# Altium PCB Joystick OMNI ADC.PcbDoc
Units mil, origin at the board's own origin, x right, y up, seen from the top; angles counter-clockwise.
Board outline 6000 x 4000 mil, 2 copper layers (Top Layer, Bottom Layer); 9 components, 0 nets, 69 pads, 0 vias.
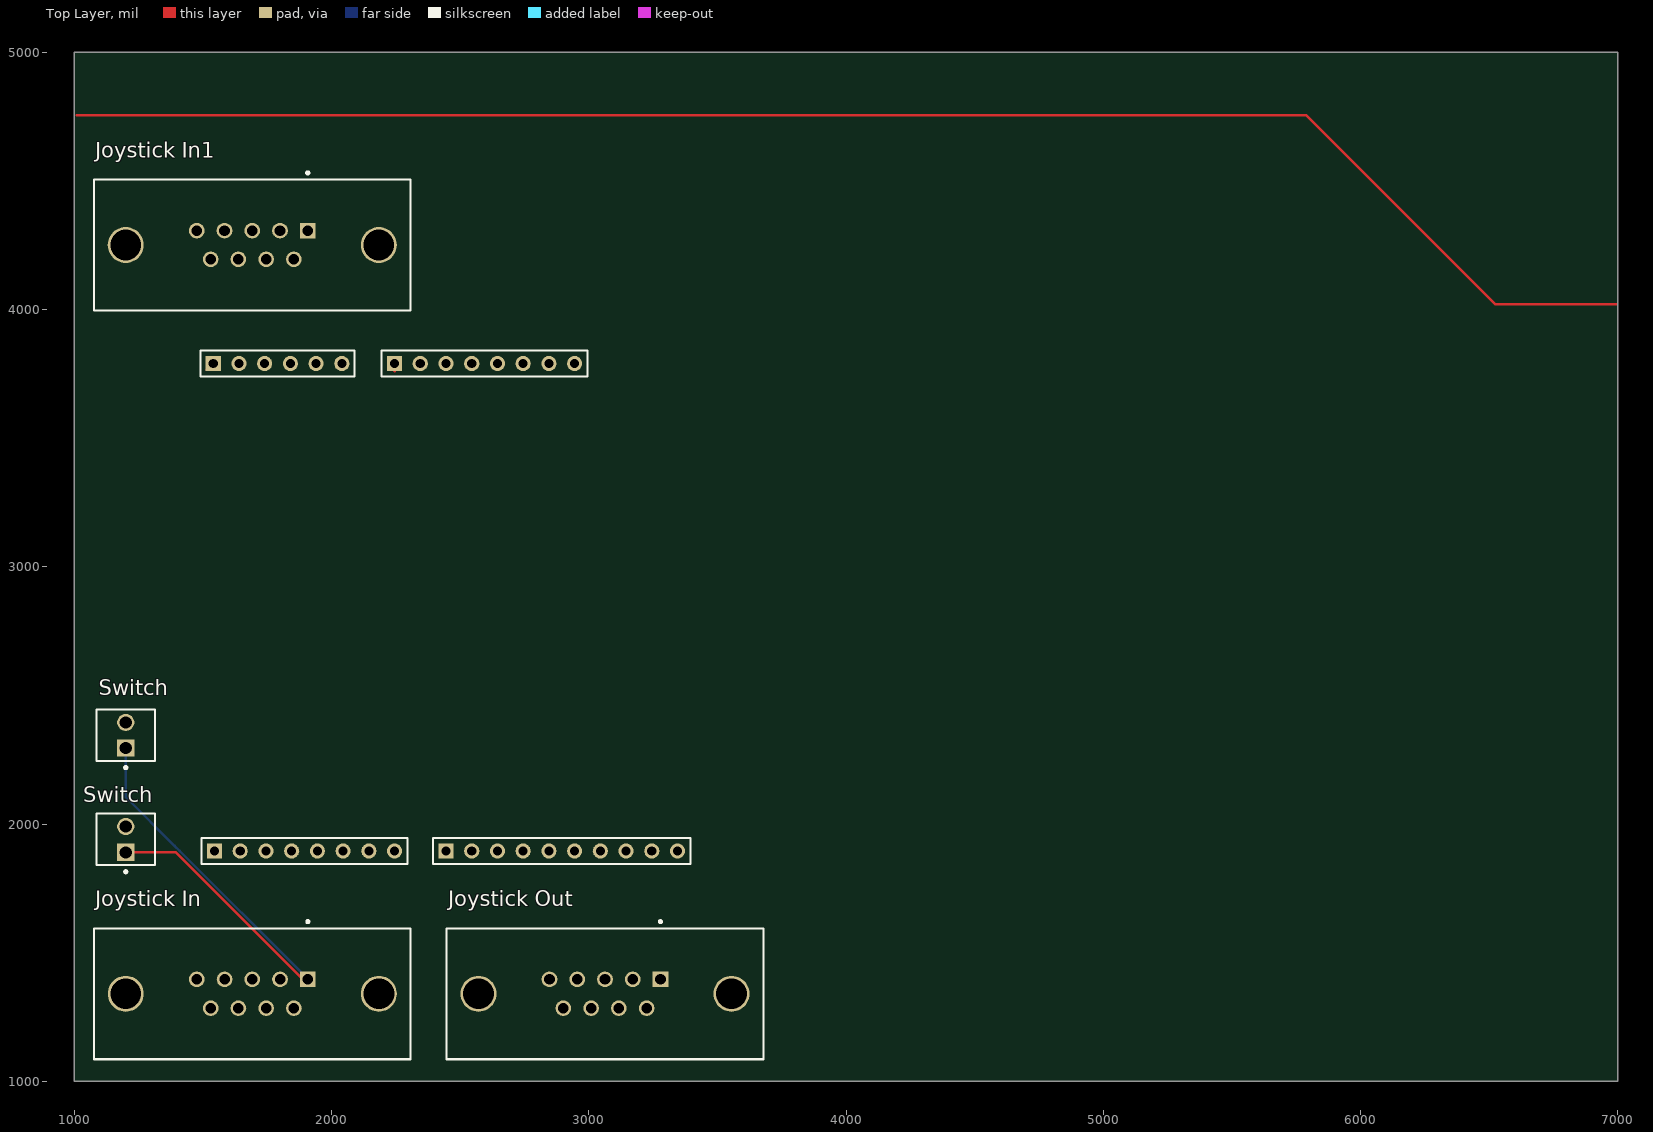
[diagram p0: Top Layer view]
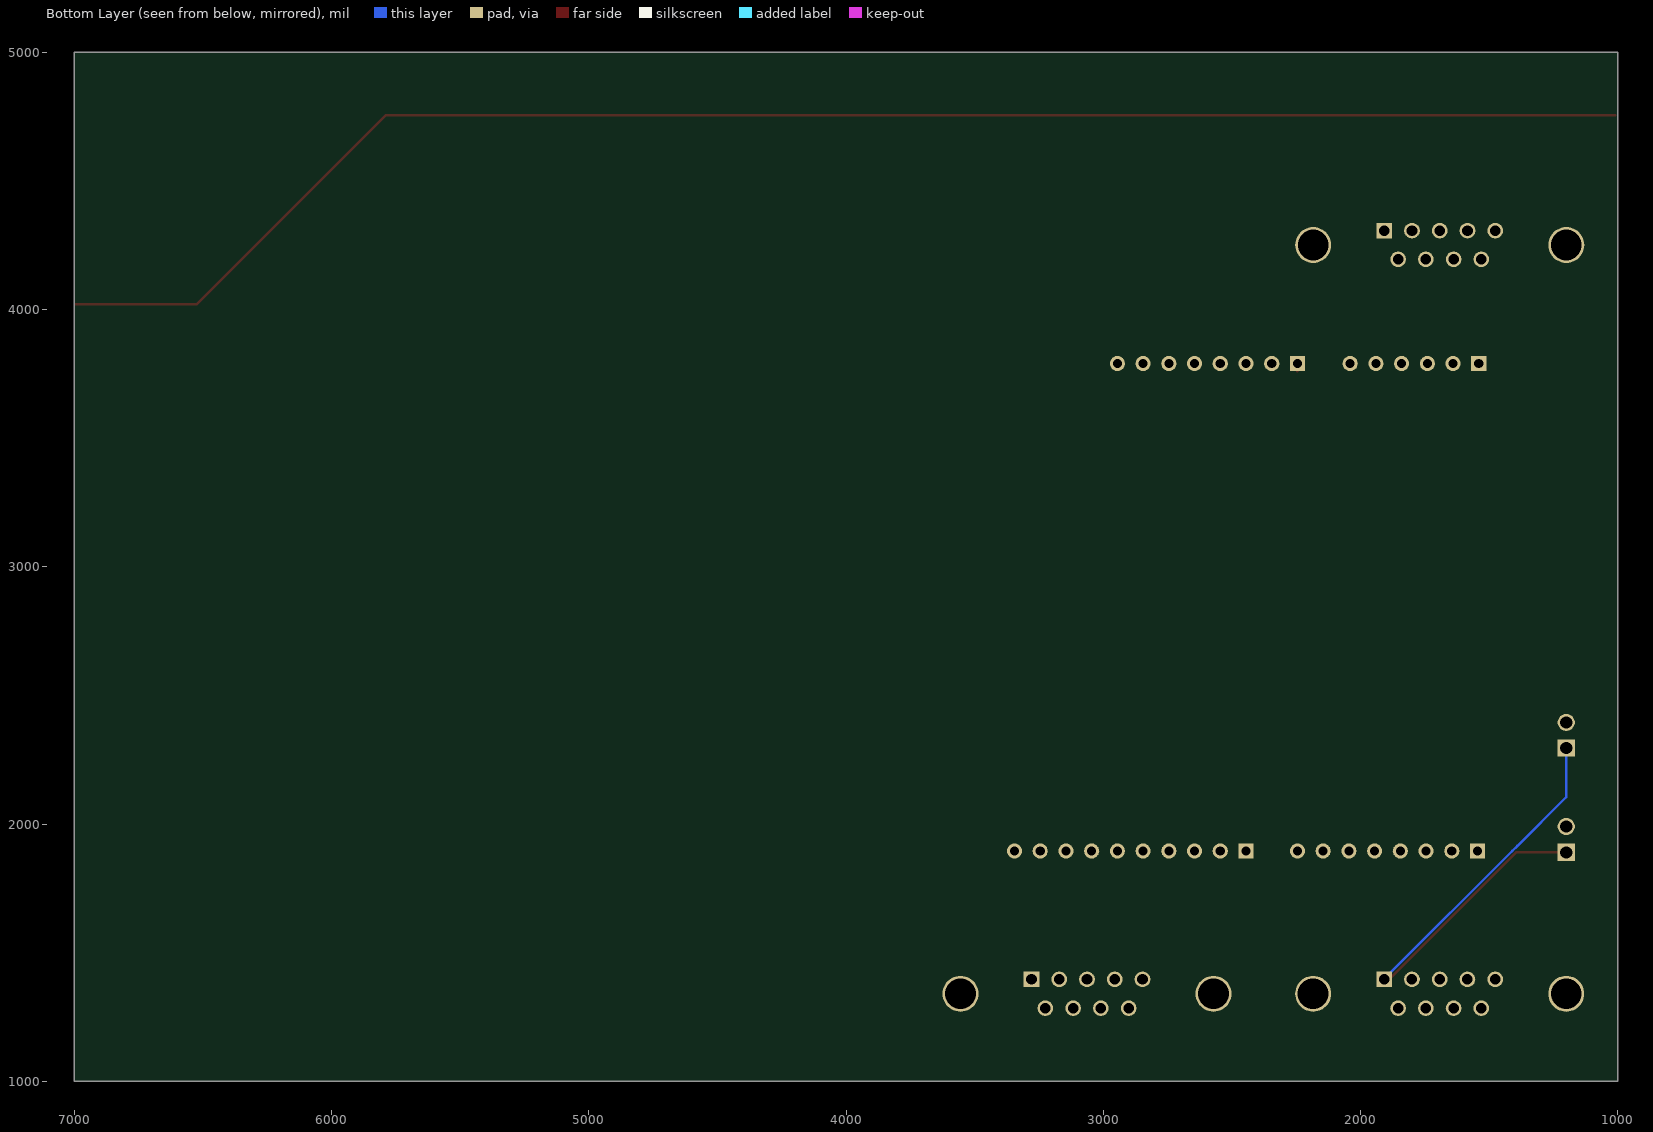
[diagram p1: Bottom Layer view, seen from below]

## Layer stack, top to bottom
Top Solder: solder mask 0.4, Solder Resist, Dk 3.5
Top Layer: signal copper 1.4
Dielectric 1: dielectric 12.6, FR-4, Dk 4.8
Bottom Layer: signal copper 1.4
Bottom Solder: solder mask 0.4, Solder Resist, Dk 3.5

## Board outline
1000,1000 7000,1000 7000,5000 1000,5000

## Design rules (kind name [scope] priority, off if disabled: settings)
Clearance [All] p1: gap=10 ignorepadtopadclearanceinfootprint=FALSE except(0: Arc-Hole Track-Hole SMDPad-Hole THPad-Hole Via-Hole Fill-Hole Poly-Hole Region-Hole Text-Hole)
PolygonConnect [All] p1: connectstyle=Relief reliefconductorwidth=10 reliefentries=4 polygonreliefangle="90 Angle" airgapwidth=10
RoutingVias [All] p1: holewidth=28 width=50 viastyle="Through Hole" minholewidth=28 minwidth=50 maxholewidth=28 maxwidth=50
SolderMaskExpansion [All] p1: expansion=4
Width [All] p1: maxlimit=10 minlimit=10 preferedwidth=10
30 further rules are at their usual default settings.

## Components (designator, comment, footprint, x,y, rotation, side; value= is the part's Value field where it differs from the comment)
"Joystick In" "Comment" TECO-1-5747150-4_V 1691.93,1340 r0 top
"Joystick In1" "Comment" TECO-1-5747150-4_V 1691.81,4250.91 r0 top
"Joystick Out" "Comment" TECO-1-5747150-4_V 3063.07,1340 r0 top
Switch "Comment" MOLX-22-27-2021_V 1200,2345 r90 top
Switch "Comment" MOLX-22-27-2021_V 1200,1940 r90 top
? "Comment" HDR1X10 2445,1895 r0 top
? "Comment" HDR1X8 1545,1895 r0 top
? "Comment" HDR1X8 2245,3790 r0 top
? "Comment" HDR1X6 1540,3790 r0 top

## Footprints (in the part's own frame and the unit in brackets; to place one, negate y for a bottom-side part, rotate by r counter-clockwise, add the part's x,y. Pads: shape width x height; smd on the part's side, far side on the other; paste and mask are expansions set on the pad)
HDR1X6 [mm] "Connector; Header; 6 Position"
  rect 1.5x1.5 hole 0.9: 1(0,0)
  round 1.5 hole 0.9: 2(2.54,0) 3(5.08,0) 4(7.62,0) 5(10.16,0) 6(12.7,0)
  silkscreen extent -1.27,-1.27 13.97,1.27
HDR1X8 [mm] "Connector; Header; 8 Position"
  rect 1.5x1.5 hole 0.9: 1(0,0)
  round 1.5 hole 0.9: 2(2.54,0) 3(5.08,0) 4(7.62,0) 5(10.16,0) 6(12.7,0) 7(15.24,0) 8(17.78,0)
  silkscreen extent -1.27,-1.27 19.05,1.27
HDR1X10 [mm] "Connector; Header; 10 Position"
  rect 1.5x1.5 hole 0.9: 1(0,0)
  round 1.5 hole 0.9: 2(2.54,0) 3(5.08,0) 4(7.62,0) 5(10.16,0) 6(12.7,0) 7(15.24,0) 8(17.78,0) 9(20.32,0) 10(22.86,0)
  silkscreen extent -1.27,-1.27 24.13,1.27
MOLX-22-27-2021_V [mm] "Header, 2-Leads, Body 5.8x5.08mm"
  rect 1.7x1.7 hole 1.19: 1(-1.27,0)
  round 1.7 hole 1.19: 2(1.27,0)
  silkscreen extent -3.31,-2.9 2.54,2.9, body extent -2.54,-2.9 2.54,2.9, height 11.72
TECO-1-5747150-4_V [mm] "Connector, 9-Leads, Body 31.27x12.93mm, Pitch 2.74mm"
  rect 1.55x1.55 hole 1.04: 1(5.48,1.42)
  round 1.55 hole 1.04: 2(2.74,1.42) 3(0,1.42) 4(-2.74,1.42) 5(-5.48,1.42) 6(4.11,-1.42) 7(1.37,-1.42) 8(-1.37,-1.42) 9(-4.11,-1.42)
  round 3.55 hole 3.05 unplated: MH1(-12.495,0) MH2(12.495,0)
  silkscreen extent -15.64,-6.47 15.64,7.24, body extent -15.48,-6.3 15.48,6.3, height 12.85

## Nets (pads, with @x,y where several pads share a name; then routed paths per layer and width w, separated by ;. In a path a pad name is that pad's centre, name@x,y a point inside that pad or via, vN(x,y) a via of type N, cw(c..) or ccw(c..) an arc to the next point about the centre after c; other vN are vias at no path point)
pads on no net: "Joystick In1.1" "Joystick In1.2" "Joystick In1.3" "Joystick In1.4" "Joystick In1.5" "Joystick In1.6" "Joystick In1.7" "Joystick In1.8" "Joystick In1.9" "Joystick In1.MH1" "Joystick In1.MH2" "Joystick In.1" "Joystick In.2" "Joystick In.3" "Joystick In.4" "Joystick In.5" "Joystick In.6" "Joystick In.7" "Joystick In.8" "Joystick In.9" "Joystick In.MH1" "Joystick In.MH2" "Joystick Out.1" "Joystick Out.2" "Joystick Out.3" "Joystick Out.4" "Joystick Out.5" "Joystick Out.6" "Joystick Out.7" "Joystick Out.8" "Joystick Out.9" "Joystick Out.MH1" "Joystick Out.MH2" ?.1 ?.2 ?.3 ?.4 ?.5 ?.6 ?.7 ?.8 ?.9 ?.10 Switch.1 Switch.2
copper on no net: | length 8421.1
  Top Layer w10: 1010,4755 5790,4755 6525,4020 6995,4020 ; 1200,1890 1225,1890 1270,1890 1395,1890 1423.46,1861.54 1880,1405 ; 1515.47,3765.47 1540,3790 ; 2220.47,3765.47 2230,3775 2245,3760
  Bottom Layer w10: 1200,2295 1200,2105 1390,1915 1410,1895 1885,1420 1907.68,1420

## Dimensions
1465,1890 to 1425,3790 on Top Layer